# Altium PCB FPv1.3.5.PcbDoc (part 9 of 9)
Units mil, origin at the board's own origin, x right, y up, seen from the top; angles counter-clockwise.
Board outline 3200 x 2100 mil, 4 copper layers (Top Layer, GROUND PLANE, POWER PLANE, Bottom Layer); 98 components, 183 nets, 614 pads, 312 vias.
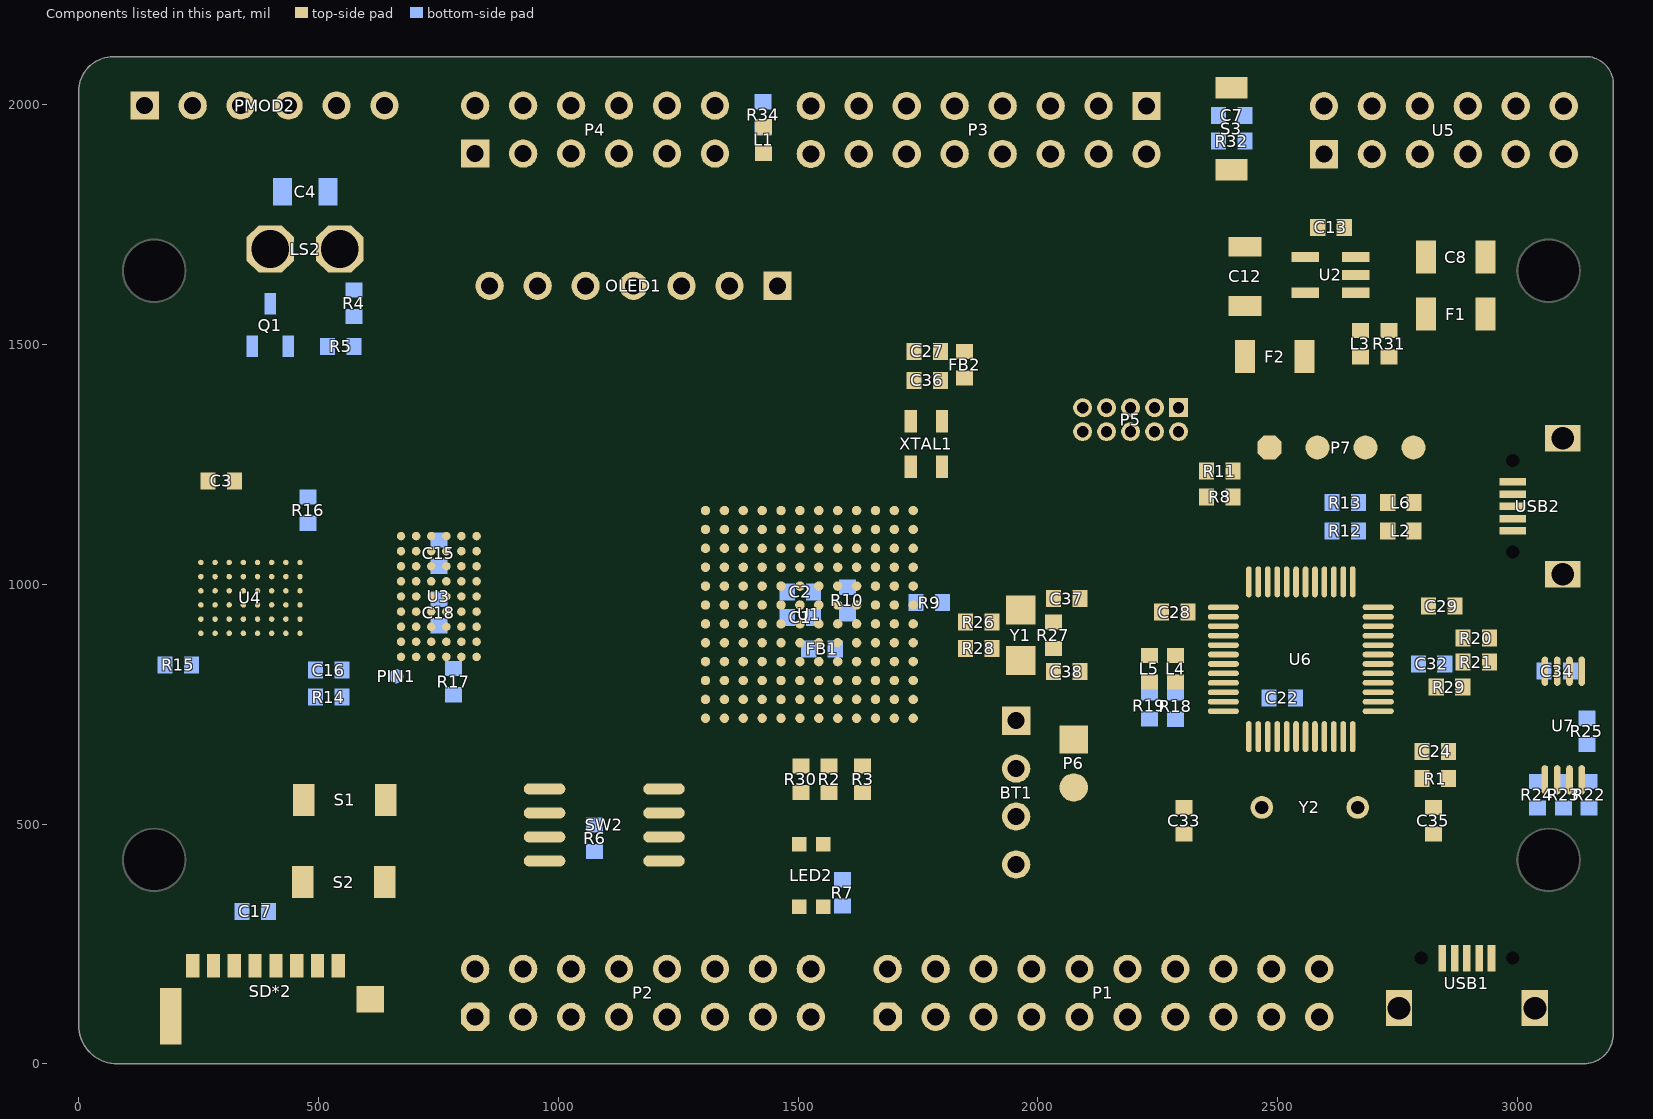
[diagram p11: the components of this part, seen from the top]

## Via types
v1: diameter 15.87, hole 7.87, Top Layer to Bottom Layer, tented both sides, 261 vias
v2: diameter 19.8, hole 11.81, Top Layer to Bottom Layer, tented both sides, 25 vias
v3: diameter 23.62, hole 15.75, Top Layer to Bottom Layer, tented both sides, 11 vias
v4: diameter 20, hole 13, Top Layer to Bottom Layer, tented both sides, 5 vias
v5: diameter 27.68, hole 15.75, Top Layer to Bottom Layer, tented both sides, 3 vias
v6: diameter 23.74, hole 15.75, Top Layer to Bottom Layer, tented both sides, 2 vias
v7: diameter 19.8, hole 9.84, Top Layer to Bottom Layer, tented both sides, 2 vias
v8: diameter 23.62, hole 9.45, Top Layer to Bottom Layer, tented both sides, 1 vias
v9: diameter 17.24, hole 9.06, Top Layer to Bottom Layer, tented both sides, 1 vias
v10: diameter 23.74, hole 11.81, Top Layer to Bottom Layer, tented both sides, 1 vias

## Nets (pads, with @x,y where several pads share a name; then routed paths per layer and width w, separated by ;. In a path a pad name is that pad's centre, name@x,y a point inside that pad or via, vN(x,y) a via of type N, cw(c..) or ccw(c..) an arc to the next point about the centre after c; other vN are vias at no path point) (continued)
copper on no net: (continued)
  Top Layer w1: 2343,1529 2346,1529 ; 2343,1552 2345,1552 ; 2343,1560 2345,1560 ; 2343,1603 2345,1603 ; 2343,1604 2346,1604 ; 2343,1613 2346,1613 ; 2343,1652 2345,1652 ; 2343,1653 2345,1653 ; 2344,1530 2346,1530 ; 2344,1531 2346,1531 ; 2344,1553 2346,1553 ; 2344,1554 2346,1554 ; 2344,1557 2346,1557 ; 2344,1558 2346,1558 ; 2344,1559 2346,1559 ; 2344,1594 2347,1594 ; 2344,1605 2346,1605 ; 2344,1611 2346,1611 ; 2344,1612 2346,1612 ; 2344,1650 2346,1650 ; 2344,1651 2346,1651 ; 2345,1532 2347,1532 ; 2345,1533 2347,1533 ; 2345,1555 2346,1555 ; 2345,1556 2346,1556 ; 2345,1570 2347,1570 ; 2345,1571 2347,1571 ; 2345,1572 2347,1572 ; 2345,1573 2347,1573 ; 2345,1574 2347,1574 ; 2345,1575 2347,1575 ; 2345,1576 2347,1576 ; 2345,1577 2347,1577 ; 2345,1578 2347,1578 ; 2345,1583 2348,1583 ; 2345,1593 2348,1593 ; 2345,1606 2347,1606 ; 2345,1607 2347,1607 ; 2345,1608 2347,1608 ; 2345,1609 2347,1609 ; 2345,1610 2347,1610 ; 2345,1647 2347,1647 ; 2345,1648 2347,1648 ; 2345,1649 2347,1649 ; 2346,1534 2348,1534 ; 2346,1535 2348,1535 ; 2346,1536 2348,1536 ; 2346,1579 2347,1579 ; 2346,1584 2348,1584 ; 2346,1585 2349,1585 ; 2346,1592 2348,1592 ; 2346,1645 2348,1645 ; 2346,1646 2348,1646 ; 2347,1537 2349,1537 ; 2347,1538 2349,1538 ; 2347,1539 2350,1539 ; 2347,1586 2349,1586 ; 2347,1587 2349,1587 ; 2347,1588 2349,1588 ; 2347,1589 2349,1589 ; 2347,1590 2349,1590 ; 2347,1591 2349,1591 ; 2347,1642 2349,1642 ; 2347,1643 2349,1643 ; 2347,1644 2349,1644 ; 2348,1540 2350,1540 ; 2348,1541 2350,1541 ; 2348,1639 2350,1639 ; 2348,1640 2350,1640 ; 2348,1641 2350,1641 ; 2349,1542 2351,1542 ; 2349,1543 2351,1543 ; 2349,1544 2351,1544 ; 2349,1636 2351,1636 ; 2349,1637 2351,1637 ; 2349,1638 2351,1638 ; 2350,1545 2352,1545 ; 2350,1546 2352,1546 ; 2350,1547 2352,1547 ; 2350,1548 2352,1548 ; 2350,1633 2352,1633 ; 2350,1634 2352,1634 ; 2350,1635 2352,1635 ; 2351,1549 2353,1549 ; 2351,1550 2353,1550 ; 2351,1551 2353,1551 ; 2351,1629 2353,1629 ; 2351,1630 2353,1630 ; 2351,1631 2353,1631 ; 2351,1632 2353,1632 ; 2352,1552 2354,1552 ; 2352,1553 2354,1553 ; 2352,1554 2354,1554 ; 2352,1555 2354,1555 ; 2352,1625 2354,1625 ; 2352,1626 2354,1626 ; 2352,1627 2354,1627 ; 2352,1628 2354,1628 ; 2353,1556 2354,1556 ; 2353,1557 2355,1557 ; 2353,1558 2355,1558 ; 2353,1559 2355,1559 ; 2353,1560 2355,1560 ; 2353,1621 2355,1621 ; 2353,1622 2355,1622 ; 2353,1623 2355,1623 ; 2353,1624 2355,1624 ; 2354,1561 2355,1561 ; 2354,1562 2356,1562 ; 2354,1563 2356,1563 ; 2354,1564 2356,1564 ; 2354,1565 2356,1565 ; 2354,1615 2356,1615 ; 2354,1616 2356,1616 ; 2354,1617 2356,1617 ; 2354,1618 2356,1618 ; 2354,1619 2356,1619 ; 2354,1620 2355,1620 ; 2355,1566 2356,1566 ; 2355,1567 2357,1567 ; 2355,1568 2357,1568 ; 2355,1569 2357,1569 ; 2355,1570 2357,1570 ; 2355,1571 2357,1571 ; 2355,1572 2357,1572 ; 2355,1573 2357,1573 ; 2355,1607 2357,1607 ; 2355,1608 2357,1608 ; 2355,1609 2357,1609 ; 2355,1610 2357,1610 ; 2355,1611 2357,1611 ; 2355,1612 2357,1612 ; 2355,1613 2357,1613 ; 2355,1614 2356,1614 ; 2356,1574 2357,1574 ; 2356,1575 2358,1575 ; 2356,1576 2358,1576 ; 2356,1577 2358,1577 ; 2356,1578 2358,1578 ; 2356,1579 2358,1579 ; 2356,1580 2358,1580 ; 2356,1581 2358,1581 ; 2356,1582 2358,1582 ; 2356,1583 2358,1583 ; 2356,1584 2358,1584 ; 2356,1585 2358,1585 ; 2356,1586 2358,1586 ; 2356,1587 2358,1587 ; 2356,1588 2358,1588 ; 2356,1589 2358,1589 ; 2356,1590 2358,1590 ; 2356,1591 2358,1591 ; 2356,1592 2358,1592 ; 2356,1593 2358,1593 ; 2356,1594 2358,1594 ; 2356,1595 2358,1595 ; 2356,1596 2358,1596 ; 2356,1597 2358,1597 ; 2356,1598 2358,1598 ; 2356,1599 2358,1599 ; 2356,1600 2358,1600 ; 2356,1601 2358,1601 ; 2356,1602 2358,1602 ; 2356,1603 2358,1603 ; 2356,1604 2358,1604 ; 2356,1605 2358,1605 ; 2356,1606 2357,1606

## Polygon pours and split planes (outlines as drawn)
GND on GROUND PLANE (split plane): 72.44,2079.9 3142.13,2079.9 3142.6,2079.95 3147.07,2079.66 3151.92,2078.69 3156.61,2077.1 3161.05,2074.91 3165.17,2072.16 3168.89,2068.89 3172.16,2065.17 3174.91,2061.05 3177.1,2056.61 3178.69,2051.92 3179.66,2047.07 3179.95,2042.6 3179.9,2042.13 3179.9,62.2 3179.96,61.67 3179.63,56.7 3178.55,51.28 3176.78,46.06 3174.34,41.11 3171.27,36.52 3167.63,32.37 3163.48,28.73 3158.89,25.66 3153.94,23.22 3148.72,21.45 3143.3,20.37 3138.33,20.04 3137.8,20.1 80.71,20.1 80.11,20.04 73.91,20.39 67.2,21.53 60.66,23.41 54.37,26.02 48.41,29.31 42.86,33.25 37.78,37.78 33.25,42.86 29.31,48.41 26.02,54.37 23.41,60.66 21.53,67.2 20.39,73.91 20.04,80.11 20.1,80.71 20.1,2027.56 20.05,2028.07 20.35,2033.43 21.33,2039.22 22.96,2044.87 25.21,2050.3 28.05,2055.45 31.45,2060.24 35.37,2064.63 39.76,2068.55 44.55,2071.95 49.7,2074.79 55.13,2077.04 60.78,2078.67 66.57,2079.65 71.93,2079.95
3.3V on POWER PLANE (split plane): 72.44,2079.9 3142.13,2079.9 3142.6,2079.95 3147.07,2079.66 3151.92,2078.69 3156.61,2077.1 3161.05,2074.91 3165.17,2072.16 3168.89,2068.89 3172.16,2065.17 3174.91,2061.05 3177.1,2056.61 3178.69,2051.92 3179.66,2047.07 3179.95,2042.6 3179.9,2042.13 3179.9,62.2 3179.96,61.67 3179.63,56.7 3178.55,51.28 3176.78,46.06 3174.34,41.11 3171.27,36.52 3167.63,32.37 3163.48,28.73 3158.89,25.66 3153.94,23.22 3148.72,21.45 3143.3,20.37 3138.33,20.04 3137.8,20.1 80.71,20.1 80.11,20.04 73.91,20.39 67.2,21.53 60.66,23.41 54.37,26.02 48.41,29.31 42.86,33.25 37.78,37.78 33.25,42.86 29.31,48.41 26.02,54.37 23.41,60.66 21.53,67.2 20.39,73.91 20.04,80.11 20.1,80.71 20.1,2027.56 20.05,2028.07 20.35,2033.43 21.33,2039.22 22.96,2044.87 25.21,2050.3 28.05,2055.45 31.45,2060.24 35.37,2064.63 39.76,2068.55 44.55,2071.95 49.7,2074.79 55.13,2077.04 60.78,2078.67 66.57,2079.65 71.93,2079.95

## Keep-outs
Keep-Out Layer:
  the board outline again, w10

## Other copper
Top Layer:
  rectangle net 3.3V: 2397,1440 2466,1599
  rectangle net 3.3V: 1464.57,878.2 1484.25,996.06
  rectangle net 3.3V: 1464.57,987 1494.87,996.06
  rectangle net GND: 1543.31,956.69 1582.68,996.06
  rectangle net GND: 1504.32,934 1576,978
Bottom Layer:
  rectangle net GND: 1529,976.38 1595.62,994
  rectangle net 3.3V: 1462,849 1493,967
  rectangle net 3.3V: 1462,847 1514,883
  rectangle net GND: 1517,931 1563,971

## Silkscreen, mask and mechanical layers (free items; w line width, h text height)
Top Overlay:
  drawing of 2445 lines, arcs and shapes, not listed
  text "GND" at 2488.19,2015.75 h20 r90
  text ">" at 1417.82,1922.76 h30 r270
  text "B20" at 109,1898 h40
  text "B23" at 210.2,1898 h40
  text "B22" at 311.4,1898 h40
  text "B21" at 412.6,1898 h40
  text "GND" at 513.8,1898.16 h40
  text "3V3" at 615,1898.16 h40
  text "RST" at 2488.19,1852.36 h20 r90
  text "A13" at 2569,1812 h40
  text "A12" at 2670.41,1811.84 h40
  text "A11" at 2771.82,1812 h40
  text "A5" at 2873.22,1812 h40
  text "GND" at 2974.59,1812 h40
  text "3V3" at 3076,1812 h40
  text "B3" at 802,1802.16 h40
  text "B1" at 903.11,1802.19 h40
  text "A29" at 1004.22,1802 h40
  text "A27" at 1105.34,1802 h40
  text "A25" at 1206.45,1802 h40
  text "A19" at 1307.56,1802.04 h40
  text "VCC" at 1496.06,1802.04 h40
  text "GND" at 1600.05,1802.04 h40
  text "GND" at 1704.05,1802.04 h40
  text "VCC" at 1808.04,1802.04 h40
  text "3V3" at 1912.03,1802.04 h40
  text "RST" at 2016.02,1802.04 h40
  text "3V3" at 2120.01,1802.04 h40
  text "NC" at 2224,1802.04 h40
  text "A14" at 2569,1769 h40
  text "A17" at 2670.41,1769 h40
  text "A16" at 2771.82,1769 h40
  text "A15" at 2873.22,1769 h40
  text "GND" at 2974.59,1769 h40
  text "3V3" at 3076,1769 h40
  text "B4" at 802,1754.19 h40
  text "B2" at 902.8,1754 h40
  text "B0" at 1003.6,1754.04 h40
  text "A28" at 1104.4,1754 h40
  text "A26" at 1205.2,1754 h40
  text "A24" at 1306,1754 h40
  text "A13" at 1497.15,1754.23 h40
  text "A12" at 1600.78,1754 h40
  text "A11" at 1704.4,1754 h40
  text "A10" at 1808.02,1754.27 h40
  text "A9" at 1911.65,1754.31 h40
  text "A8" at 2015.27,1754.31 h40
  text "A7" at 2118.89,1754 h40
  text "A6" at 2222.52,1754.31 h40
  text "+" at 2811.02,1734.25 h20 r90
  text "470P" at 2544,1718 h20 r90
  text "10uF" at 2843.5,1674.21 h34
  text "2.2uF" at 2439.96,1611.22 h30 r90
  text "+" at 2372.05,1595.47 h20
  text "3.3V" at 2538.39,1565.94 h20
  text "3.3V" at 2379.92,1554.13 h20 r90
  text "F" at 2867.13,1554.13 h34
  text "GND" at 837,1536.27 h34
  text "3V3" at 937,1536.27 h34
  text "B8" at 1037,1536.27 h34
  text "B7" at 1137,1536 h34
  text "B6" at 1237,1536.27 h34
  text "B5" at 1337,1536.3 h34
  text "GND" at 1437,1536.27 h34
  text "105" at 1779.53,1527.56 h20 r180
  text ">" at 2663.39,1507.87 h30 r270
  text "F" at 2488.19,1462.6 h34
  text "FB" at 1882.87,1446.85 h20 r90
  text "3.3V" at 2273.62,1418.31 h30
  text "1K" at 2718,1411 h34
  text "104" at 1782.48,1393.7 h20 r180
  text "L2" at 2468,1351 h34
  text "L3" at 2567.67,1351.2 h34
  text "H0" at 2667.33,1351.17 h34
  text "H1" at 2767,1351 h34
  text "GND" at 1669,1268 h25 r270
  text "0R" at 2362,1267 h34
  text "L1" at 2449,1202 h34
  text "104" at 283.46,1175.2 h20
  text "L0" at 2450,1168 h34
  text ">" at 2753,1129 h34
  text "1K" at 2361,1122 h34
  text "12P" at 2044.29,1001.57 h20
  text "104" at 2829.23,983.71 h20
  text "104" at 2262.8,969.49 h20
  text "0R" at 1877,949 h25
  text "1M" at 2073.82,879.53 h20 r90
  text "27R" at 2984.25,843.5 h20 r90
  text ">" at 2238.19,819.88 h20 r90
  text ">" at 2293.31,819.88 h20 r90
  text "0R" at 1877,819 h25
  text "12P" at 2048.23,772.24 h20
  text "1.5K" at 2798.23,769.69 h20 r90
  text "E24" at 1880.3,698 h34 r90
  text "RTC" at 2162,654 h34 r90
  text "104" at 2926.18,641.73 h20 r90
  text "E25" at 1880,597.33 h34 r90
  text "470R" at 2899.61,574.8 h20 r90
  text "10K" at 1473,573 h25 r90
  text "C18" at 1289,563 h25
  text "GND" at 2162,552 h34 r90
  text "C3" at 703,539 h34
  text "0R" at 1626,524 h25
  text "0R" at 1556,523 h25
  text "C19" at 1289,513.33 h25
  text "GND" at 1880.03,496.63 h34 r90
  text "27P" at 2268.7,492.13 h20 r90
  text "27P" at 2869.09,492.13 h20 r90
  text "6MHZ" at 2530.51,482.28 h30
  text "GND" at 931,480 h25 r90
  text "C15" at 1289,463.69 h25
  text "C12" at 1289,414 h25
  text "5V" at 1880,396 h34 r90
  text "C14" at 699,370 h34
  text "V 1.3.5" at 57,354 h100 r270
  text "D8" at 812,310 h34
  text "D10" at 910.83,309.97 h34
  text "D12" at 1009.67,309.73 h34
  text "D14" at 1108.5,309.73 h34
  text "E6" at 1207.33,310 h34
  text "E8" at 1306.17,310 h34
  text "E10" at 1405,310 h34
  text "ADC" at 1659,310 h34
  text "ADC" at 1759.38,310 h34
  text "ADC" at 1859.76,310 h34
  text "ADC" at 1960.13,310 h34
  text "ADC" at 2060.51,310 h34
  text "ADC" at 2160.89,310 h34
  text "DAC" at 2261.27,310 h34
  text "E25" at 2361.64,310.03 h34
  text "E26" at 2462.02,310 h34
  text "E28" at 2562.4,310 h34
  text "+" at 1572,278 h34 r90
  text "E0" at 226,273.57 h34
  text "GND" at 335.92,274 h30 r90
  text "3V3" at 422.24,274 h34 r90
  text "E3" at 441.71,273.54 h34
  text "E5" at 528,273.63 h34
  text "E1" at 269.14,273.34 h34
  text "E2" at 355.43,273.34 h34
  text "E4" at 484.86,273.34 h34
  text "D7" at 812,261.73 h34
  text "D9" at 910.83,262 h34
  text "D11" at 1009.67,261.73 h34
  text "D13" at 1108.5,261.93 h34
  text "D15" at 1207.33,262.03 h34
  text "E7" at 1306.17,261.73 h34
  text "E9" at 1405,262 h34
  text "ADC" at 1659,262 h34
  text "ADC" at 1759.33,262 h34
  text "ADC" at 1859.67,262 h34
  text "ADC" at 1960,262 h34
  text "ADC" at 2060.33,262 h34
  text "ADC" at 2160.67,262 h34
  text "DAC" at 2261,262 h34
  text "E24" at 2361.33,261.73 h34
  text "GND" at 2461.67,262 h34
  text "E27" at 2562,261.73 h34
  text "E12" at 1610,177 h34 r90
  text "E11" at 1609.83,81 h34 r90
Bottom Overlay:
  lines w10: 478,735 568,735 ; 478,792 569,792 ; 478,847 566,847
  text "1k" at 1418.31,2036.42 h30 r270
  text "104" at 2333.66,1964.57 h20 r270
  text "10K" at 2332.68,1912.4 h20 r270
  text "C" at 481,1804 h40
  text "10K" at 629,1609 h34 r90
  text "NPN" at 425,1527 h40
  text "1K" at 562,1441 h34
  text "10K" at 495,1210 h20
  text "1K" at 2582,1130 h34
  text "104" at 726.35,1076.9 h20 r90
  text "104" at 1451,982 h25 r90
  text "0R" at 1671,980 h25 r90
  text "104" at 726.35,943.9 h20 r90
  text "33nF" at 2846.46,861.22 h30
  text "c" at 3091,855 h34
  text "FB" at 1549,823 h25
  text "10K" at 278.54,817.91 h20 r270
  text "104" at 446.85,811.02 h20
  text "100R" at 826,809 h20 r90
  text "104" at 2525.59,795.28 h30
  text "10K" at 447,757 h20
  text "2.2K" at 3116.14,706.69 h20 r90
  text "2K" at 2275.59,672.24 h30
  text "10K" at 3000,547.24 h20 r270
  text "1R" at 1122,483 h25 r90
  text "500R" at 1639,381 h25 r90
  text "104" at 379.92,275.59 h20
Mechanical 1:
  lines w4: 1267.72,937.99 1779.53,937.99 ; 1523.62,681.1 1523.62,1192.91